# Altium PCB IRLED.PcbDoc
Units mil, origin at the board's own origin, x right, y up, seen from the top; angles counter-clockwise.
Board outline 2935 x 1985 mil, 2 copper layers (Top Layer, Bottom Layer); 17 components, 14 nets, 35 pads, 0 vias.
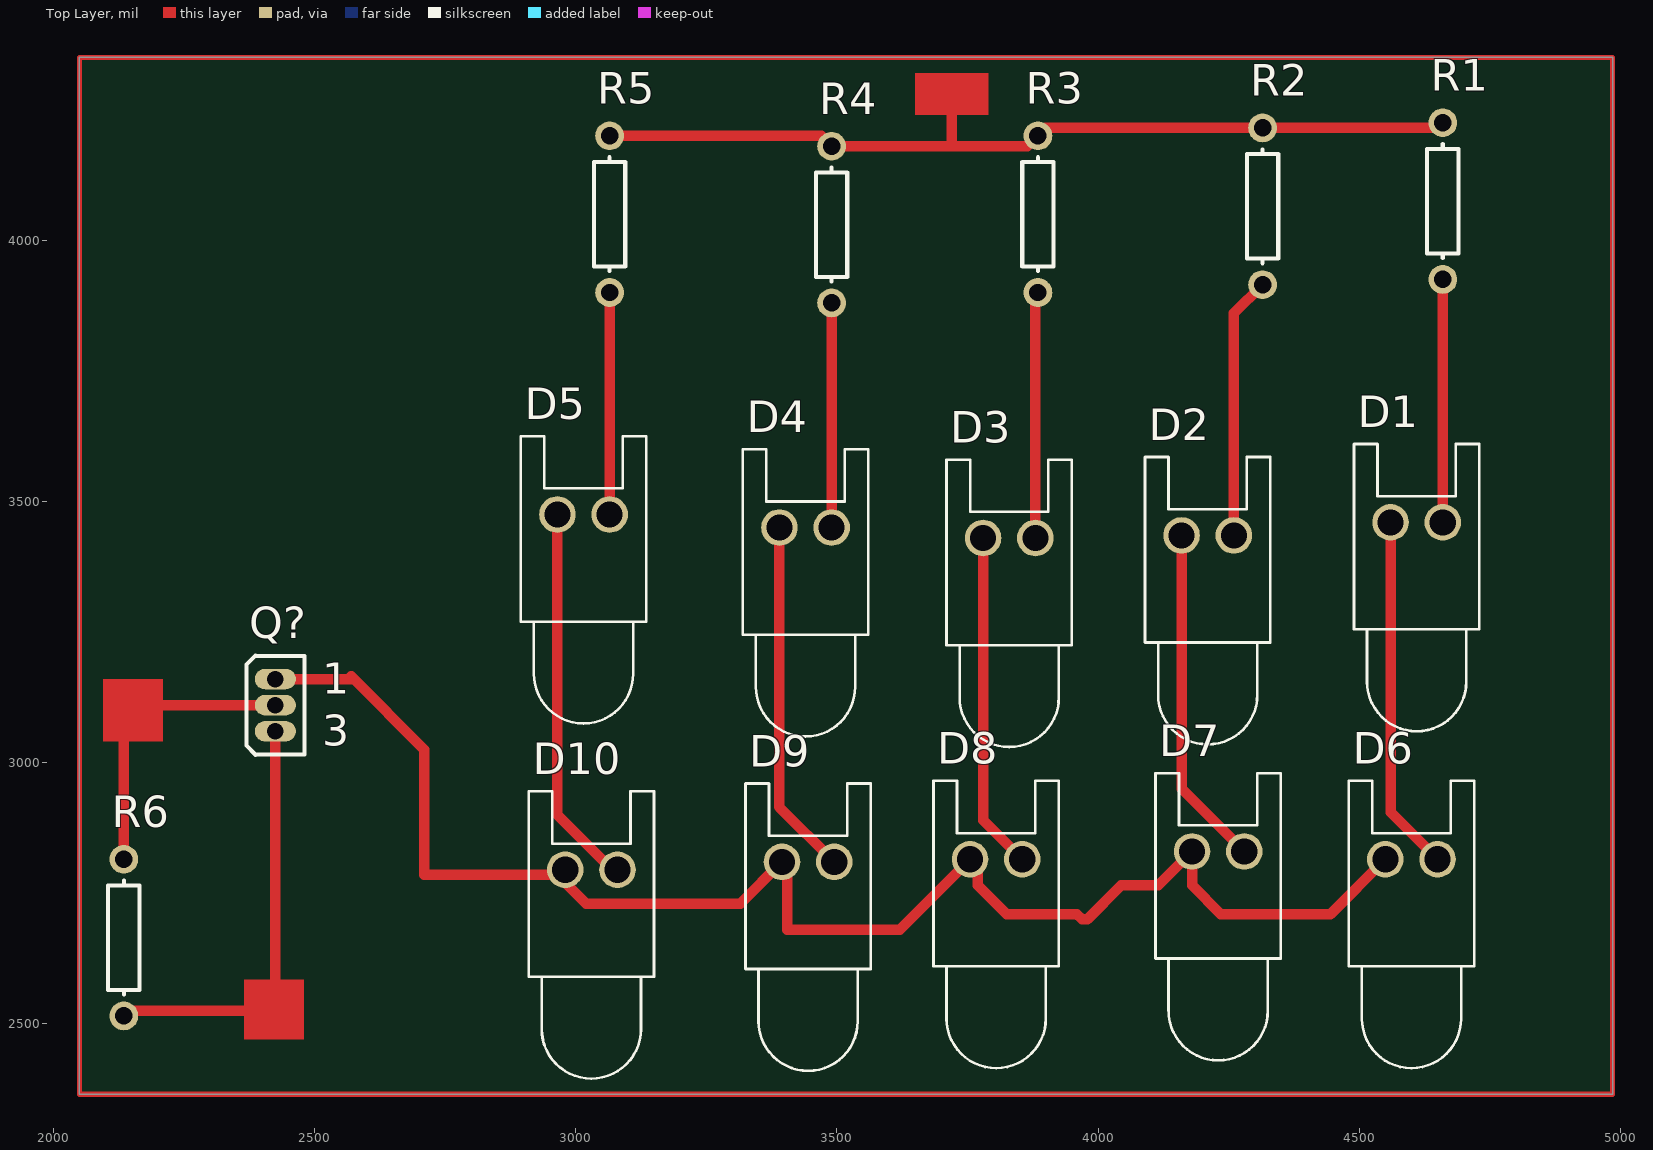
[diagram p0: Top Layer view]
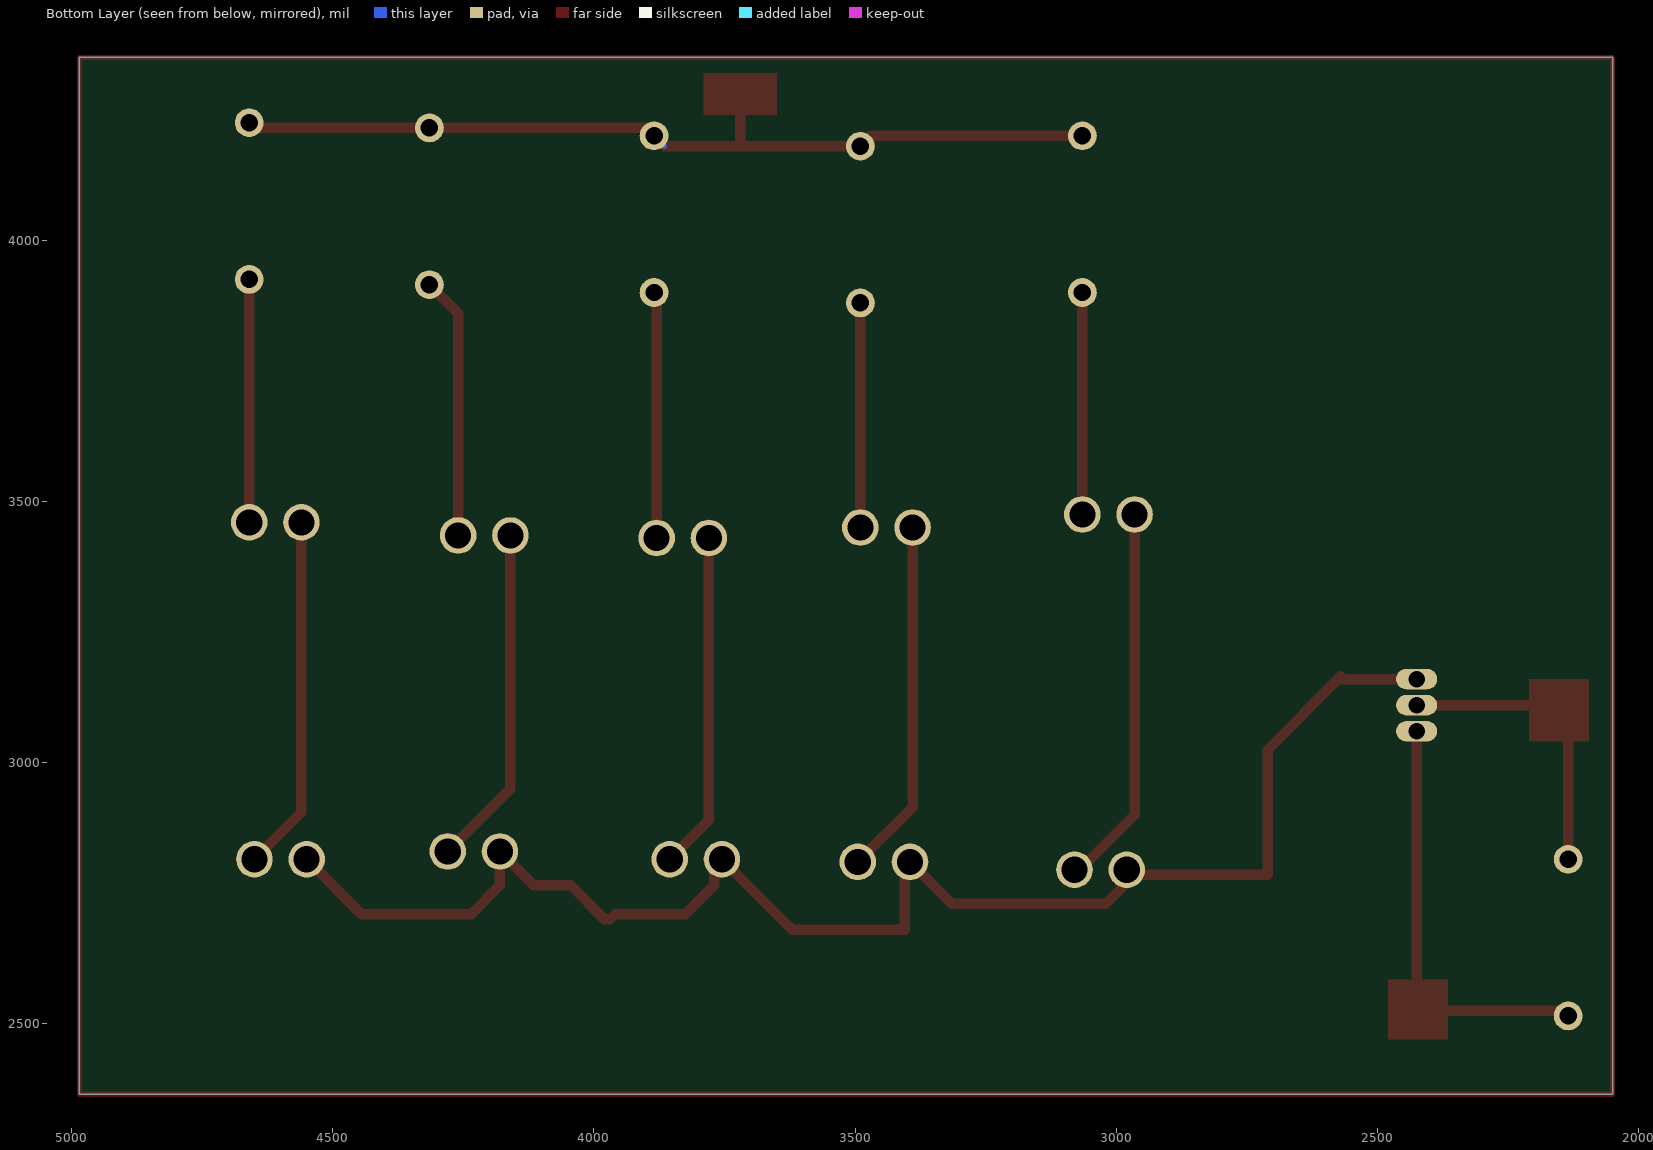
[diagram p1: Bottom Layer view, seen from below]

## Layer stack, top to bottom
Top Solder: solder mask 0.4, Solder Resist, Dk 3.5
Top Layer: signal copper 1.4
Dielectric 1: dielectric 12.6, FR-4, Dk 4.8
Bottom Layer: signal copper 1.4
Bottom Solder: solder mask 0.4, Solder Resist, Dk 3.5

## Board outline
2050,2365 2050,4350 4985,4350 4985,2365

## Design rules (kind name [scope] priority, off if disabled: settings)
Clearance [All] p1: gap=10
PolygonConnect [All] p1: connectstyle=Relief reliefconductorwidth=10 reliefentries=4 polygonreliefangle="90 Angle" airgapwidth=10
RoomDefinition IRLED [InComponentClass('IRLED')] p1: confinementstyle=ConfineIn formatcopy=TRUE lockcomponents=FALSE outline 2060,4350 4985,4350 4985,2365 2060,2365
RoutingVias [All] p1: holewidth=28 width=50 viastyle="Through Hole" minholewidth=28 minwidth=50 maxholewidth=28 maxwidth=50
SolderMaskExpansion [All] p1: expansion=4
Width [All] p1: maxlimit=20 minlimit=10 preferedwidth=20
30 further rules are at their usual default settings.

## Components (designator, comment, footprint, x,y, rotation, side; value= is the part's Value field where it differs from the comment)
D1 "LED0" LED-0 4610,3460 r0 top
D2 "LED0" LED-0 4210,3435 r0 top
D3 "LED0" LED-0 3830,3430 r0 top
D4 "LED0" LED-0 3440,3450 r0 top
D5 "LED0" LED-0 3015,3475 r0 top
D6 "LED0" LED-0 4600,2815 r0 top
D7 "LED0" LED-0 4230,2830 r0 top
D8 "LED0" LED-0 3805,2815 r0 top
D9 "LED0" LED-0 3445,2810 r0 top
D10 "LED0" LED-0 3030,2795 r0 top
Q? "MOSFET-N" E3 2425,3110 r0 top
R1 "Res1" AXIAL-0.3 4660,4075 r90 top
R2 "Res1" AXIAL-0.3 4315,4065 r90 top
R3 "Res1" AXIAL-0.3 3885,4050 r90 top
R4 "Res1" AXIAL-0.3 3490,4030 r90 top
R5 "Res1" AXIAL-0.3 3065,4050 r90 top
R6 "Res1" AXIAL-0.3 2135,2665 r90 top

## Footprints (in the part's own frame and the unit in brackets; to place one, negate y for a bottom-side part, rotate by r counter-clockwise, add the part's x,y. Pads: shape width x height; smd on the part's side, far side on the other; paste and mask are expansions set on the pad)
AXIAL-0.3 [mm] "Axial Device, Thru-Hole; 2 Leads; 0.3 in Pin Spacing"
  round 1.4 hole 0.85: 1(-3.81,0) 2(3.81,0)
  silkscreen extent -2.77,-0.76 2.77,0.76
E3 [mm] "TO, Flat Index; 3 In-Line, Axial Leads; Body Dia. 4.6mm; Lead Dia. 0.5 mm (max)"
  oval 2x1 hole 0.8: 1(0,1.27) 2(0,0) 3(0,-1.27)
  silkscreen extent -1.41,-2.41 1.41,2.41
LED-0 [mil] "LED; 2 Leads"
  round 70 hole 50: 1(50,0) 2(-50,0)
  silkscreen extent -120,-400 120,150

## Part data
D1 D2 D3 D4 D5 D6 D7 D8 D9 D10: "Typical INFRARED GaAs LED"
Q?: "N-Channel MOSFET"
R1 R2 R3 R4 R5 R6: "Resistor"

## Nets (pads, with @x,y where several pads share a name; then routed paths per layer and width w, separated by ;. In a path a pad name is that pad's centre, name@x,y a point inside that pad or via, vN(x,y) a via of type N, cw(c..) or ccw(c..) an arc to the next point about the centre after c; other vN are vias at no path point)
GND: R6.1 | length 735
  Top Layer w20: R6.1@2145,2525 2425,2525 2425,2980
NetD1_1: D1.1 R1.1 | length 465
  Top Layer w20: D1.1 R1.1
NetD1_2: D1.2 D6.1 | length 682.3
  Top Layer w20: D1.2 4560,2905 D6.1
NetD2_1: D2.1 R2.1 | length 502.8
  Top Layer w20: D2.1 4260,3860 R2.1
NetD2_2: D2.2 D7.1 | length 654.7
  Top Layer w20: D2.2 4160,2950 D7.1
NetD3_1: D3.1 R3.1 | length 465
  Top Layer w20: D3.1 R3.1@3880,3895
NetD3_2: D3.2 D8.1 | length 646.1
  Top Layer w20: D3.2 3780,2890 D8.1
NetD4_1: D4.1 R4.1 | length 430
  Top Layer w20: D4.1 R4.1
NetD4_2: D4.2 D9.1 | length 683.5
  Top Layer w20: D4.2 3390,2915 D9.1
NetD5_1: D5.1 R5.1 | length 425
  Top Layer w20: D5.1 R5.1
NetD5_2: D5.2 D10.1 | length 723.5
  Top Layer w20: D5.2 2965,2900 D10.1@3070,2795
NetD6_2: D6.2 D7.2 D8.2 D9.2 D10.2 | length 2781.9
  Top Layer w10: D9.2 D9.2@3405,2810 ; D8.2 D8.2@3770,2815
  Top Layer w20: 2570,3165 2710,3025 2710,2785 2965,2785 3020,2730 3315,2730 D9.2 ; D9.2@3405,2810 3405,2680 3620,2680 D8.2 ; D8.2@3770,2815 3770,2765 3825,2710 3959.47,2710 3969.47,2700 3979.82,2700 4044.82,2765 4115,2765 D7.2 4180,2765 4235,2710 4445,2710 D6.2
NetR1_2: R1.2 R2.2 R3.2 R4.2 R5.2 | length 1797.6
  Top Layer w10: 3470,4200 R4.2 ; 3865,4180 R3.2 R3.2@3900,4215
  Top Layer w20: R5.2 3470,4200 ; R4.2 3720,4180 ; 3720,4285 3720,4180 ; 3865,4180 3720,4180 ; R3.2@3900,4215 R2.2 R1.2@4650,4215
  Bottom Layer w10: R5.2@3060,4195 R5.2@3075,4180 ; 3865,4180 R3.2 R3.2@3900,4215 ; R1.2@4650,4215 R1.2
VCC: R6.2 | length 510
  Top Layer w20: R6.2 2135,3110 2350,3110
pads on no net: Q?.1 Q?.2 Q?.3
copper on no net: | length 10155
  Top Layer w10: 2050,2365 2050,4350 4985,4350 4985,2365 2050,2365
  Top Layer w20: 2335,3110 2425,3110 ; 2425,2980 2425,3060 ; 2425,3160 2570,3160

## Other copper
Top Layer:
  rectangle net NetR1_2: 3650,4240 3790,4320
  rectangle net VCC: 2095,3040 2210,3160
  rectangle net GND: 2365,2470 2480,2585

## Text inside footprints (layer, text, board x,y; h text height)
Q?: Top Overlay "1" at 2514.57,3131.85 h59.05; Top Overlay "3" at 2514.57,3032.72 h59.05